# EAGLE board FET_ctrl (EAGLE 7.3.0), part 1 of 2
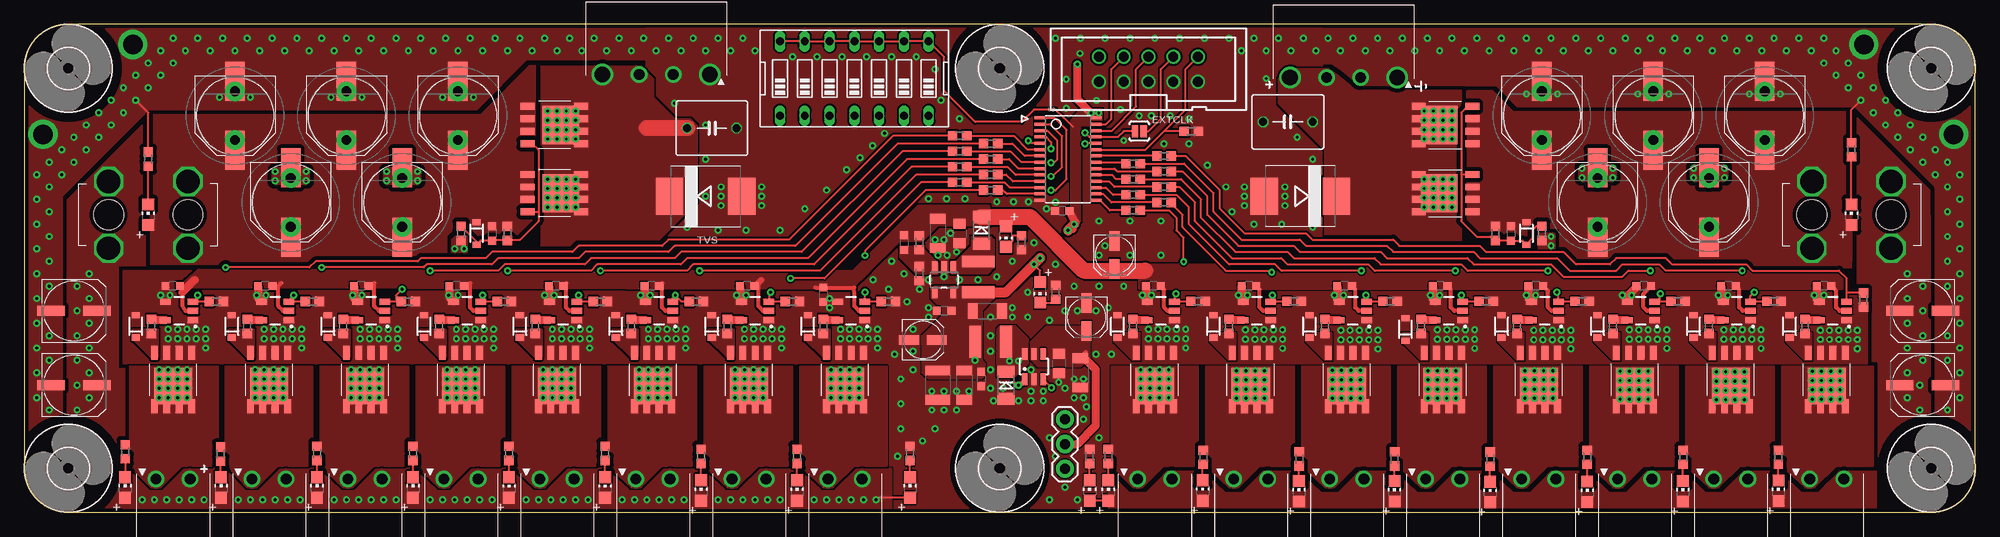
[diagram p0: board, top side]
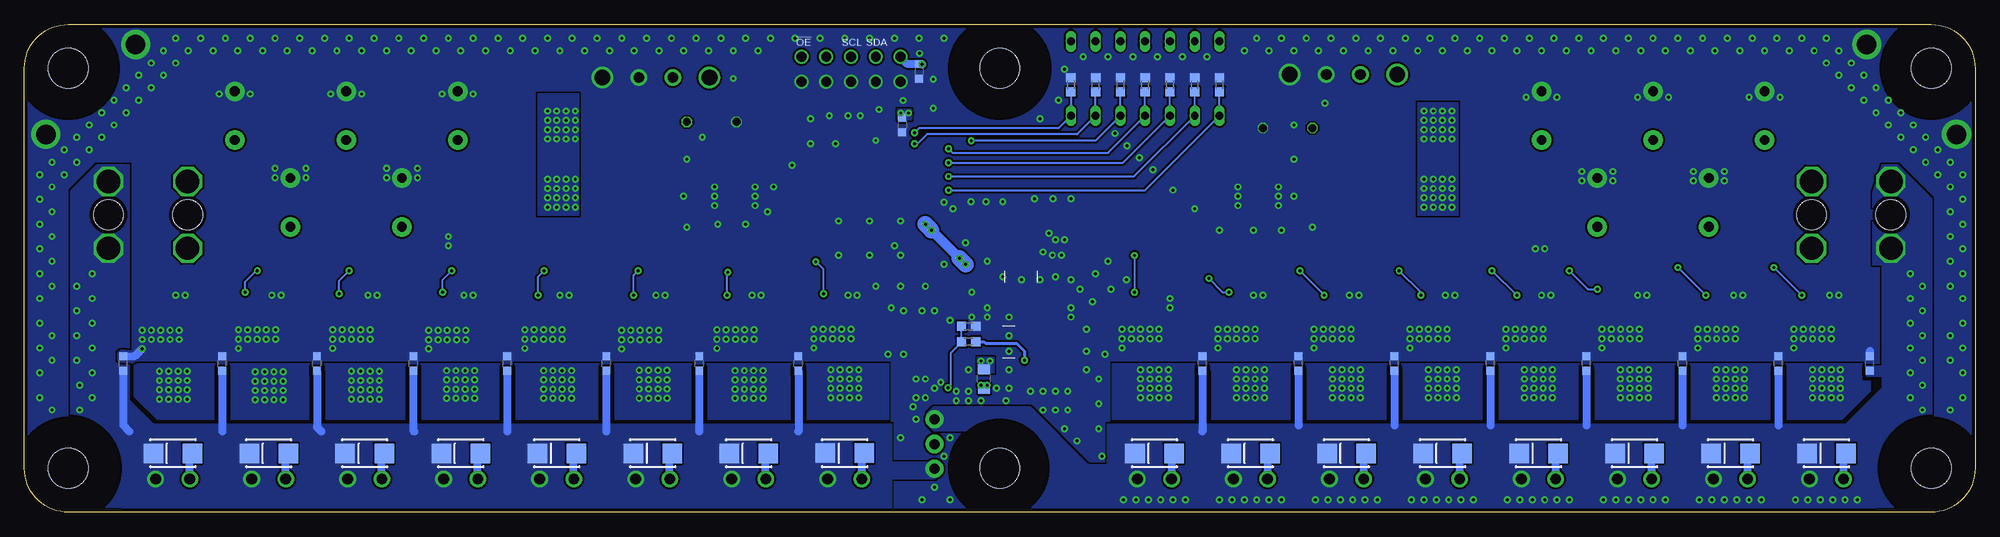
[diagram p1: board, bottom side, seen from below]

Size 200 x 50 mm. Coordinates in mm from the lower left corner, seen from the top.
Outline: 0,45.5 0,4.5 arc90 4.5,0 195.5,0 arc90 200,4.5 200,45.5 arc90 195.5,50 4.5,50 arc90 0,45.5
Copper layers (1*16): Top 0.035mm / dielectric 1.5mm / Bottom 0.035mm
Design rules "default *": minimum track width 6mil, minimum drill 0.3mm, track to track 6mil, track to pad 7mil, pad to pad 7mil, via to via 7mil, smd to smd 6mil, copper to edge 14mil, drill to drill 12mil, minimum pad ring 0.12mm, minimum via ring 8mil, stop-mask expansion 3mil, vias tented up to drill 0.31mm, thermal gap 8mil

## Footprints (pad centres in the part's own frame; a part is rotated, then mirrored left to right if it is on the bottom)
SMD_8X10_3.5HOLE = smd 4 x 2: + 3.55,0; - -3.55,0 | drill 1 pad 2: +2 2.5,0; -1 -2.5,0
C0603 = smd 0.8 x 0.8: 1 -0.75,0; 2 0.75,0
C0805 = smd 1 x 1.25: 1 -1,0; 2 1,0
UD-4X5,8_NICHICON = smd 2 x 1: + 1.425,0; - -1.425,0
C050-055X075 = drill 0.813 octagon: 1 -2.54,0; 2 2.54,0
UD-6,3X7,7_NICHICON = smd 2.8 x 1: + 2.35,0; - -2.35,0
C1206 = smd 1 x 1.6: 1 -1.5,0; 2 1.5,0
C1210 = smd 1 x 2.5: 1 -1.5,0; 2 1.5,0
SMA-DIODE_ALT = smd 2 x 2: A -2,0; C 2,0
4,1 = hole 4.1: 0,0
1X03 = drill 1.016 pad 1.88: 1 0,0; 2 2.54,0; 3 5.08,0
SJ_2S-NO = smd 0.635 x 1.27: 1 -0.45,0; 2 0.45,0
CHIP-LED0805 = smd 1.2 x 1.2: A 0,-1.05; C 0,1.05
R0603 = smd 0.95 x 0.95: 1 -0.725,0; 2 0.725,0
R1206 = smd 1.25 x 1.75: 1 -1.375,0; 2 1.375,0
EDG-07 = drill 0.813 long: 1 -7.62,-3.81; 2 -5.08,-3.81; 3 -2.54,-3.81; 4 0,-3.81; 5 2.54,-3.81; 6 5.08,-3.81; 7 7.62,-3.81; 8 7.62,3.81; 9 5.08,3.81; 10 2.54,3.81; 11 0,3.81; 12 -2.54,3.81; 13 -5.08,3.81; 14 -7.62,3.81
SMC = smd 2.8 x 3.8: A 3.7,0; C -3.7,0
TSSOP28 = smd 0.305 x 0.991: 1 -4.225,-2.918; 2 -3.575,-2.918; 3 -2.925,-2.918; 4 -2.275,-2.918; 5 -1.625,-2.918; 6 -0.975,-2.918; 7 -0.325,-2.918; 8 0.325,-2.918; 9 0.975,-2.918; 10 1.625,-2.918; 11 2.275,-2.918; 12 2.925,-2.918; 13 3.575,-2.918; 14 4.225,-2.918; 15 4.225,2.918; 16 3.575,2.918; 17 2.925,2.918; 18 2.275,2.918; 19 1.625,2.918; 20 0.975,2.918; 21 0.325,2.918; 22 -0.325,2.918; 23 -0.975,2.918; 24 -1.625,2.918; 25 -2.275,2.918; 26 -2.925,2.918; 27 -3.575,2.918; 28 -4.225,2.918
SOD-323 = smd 0.63 x 0.83: 1 -1.15,0; 2 1.15,0
SOT23-6 = smd 0.55 x 1.2: 1 0.95,1.3; 2 0,1.3; 3 -0.95,1.3; 4 -0.95,-1.3; 5 0,-1.3; 6 0.95,-1.3
FUSE-3564-297-997 = drill 2.4 pad 3 octagon: P$1 -4.064,3.429; P$2 -4.064,-3.429; P$3 4.064,3.429; P$4 4.064,-3.429 | hole 3.05: -4.064,0; 4.064,0
POWER-SO8 = smd 0.7 x 1.42: 1SOURCE -1.905,-2.39; 2SOURCE -0.635,-2.39; 3SOURCE 0.635,-2.39; 4GATE 1.905,-2.39; 5DRAIN 1.905,3.1; 6DRAIN 0.635,3.1; 7DRAIN -0.635,3.1; 8DRAIN -1.905,3.1 | smd 3.91 x 3.75: PAD_DRAIN 0,1.015
SOT23-5 = smd 0.6 x 1.1: 1 -0.95,-1.4; 2 0,-1.4; 3 0.95,-1.4; 4 0.95,1.4; 5 -0.95,1.4
SOT23-5' = smd 0.55 x 1.2: 1 -0.95,-1.3; 2 0,-1.3; 3 0.95,-1.3; 4 0.95,1.3; 5 -0.95,1.3
1212 = smd 1.2 x 3.3: P$1 -1.575,0; P$2 1.575,0
1751248 = drill 1.1 pad 1.7: 1 -1.75,-0.1; 2 1.75,-0.1
1751264 = drill 1.6 pad 2.2: 1 -5.5,-0.1; 4 5.5,-0.1 | drill 1.1 pad 1.7: 2 -1.75,-0.1; 3 1.75,-0.1
PAK100/2500-10 = drill 1 pad 1.422: 1 -5.08,-1.27; 2 -5.08,1.27; 3 -2.54,-1.27; 4 -2.54,1.27; 5 0,-1.27; 6 0,1.27; 7 2.54,-1.27; 8 2.54,1.27; 9 5.08,-1.27; 10 5.08,1.27

## Placement (x,y rotation side)
C1  [SMD_8X10_3.5HOLE]  21.59,40.64 270 top
C2  [SMD_8X10_3.5HOLE]  33.02,40.64 270 top
C3  [C0603]  15.21,23.18 180 top
C4  [C0603]  24.7,23.18 180 top
C5  [SMD_8X10_3.5HOLE]  44.45,40.64 270 top
C6  [SMD_8X10_3.5HOLE]  27.3,31.75 270 top
C7  [SMD_8X10_3.5HOLE]  178.44,40.64 270 top
C8  [SMD_8X10_3.5HOLE]  167,40.64 270 top
C9  [C0805]  101.6,13.65 90 bottom
C10  [SMD_8X10_3.5HOLE]  155.57,40.64 270 top
C11  [C0603]  47.94,28.57 270 top
C12  [C0603]  154.95,23.18 180 top
C13  [C0603]  166.02,23.18 180 top
C14  [C0603]  174.71,23.18 180 top
C15  [C0603]  184.51,23.18 180 top
C16  [C0603]  34.54,23.18 180 top
C17  [C0603]  44.32,23.18 180 top
C18  [C0603]  54.53,23.18 180 top
C19  [C0603]  64.33,23.18 180 top
C20  [C0603]  74.1,23.18 180 top
C21  [C0603]  81.92,22.29 270 top
C22  [C0603]  115.75,23.18 180 top
C23  [C0603]  125.55,23.18 180 top
C24  [C0603]  135.35,23.18 180 top
C25  [C0603]  145.15,23.18 180 top
C26  [C0603]  10.79,15.24 90 bottom
C27  [C0603]  20.16,15.24 90 bottom
C28  [C0603]  30,15.24 90 bottom
C29  [C0603]  39.85,15.24 90 bottom
C30  [C0603]  49.69,15.24 90 bottom
C31  [C0603]  59.53,15.24 90 bottom
C32  [C0603]  69.37,15.24 90 bottom
C33  [C0603]  79.22,15.24 90 bottom
C34  [C0603]  120.65,15.24 90 bottom
C35  [C0603]  130.81,15.24 90 bottom
C36  [C0603]  140.34,15.24 90 bottom
C37  [C0603]  150.5,15.24 90 bottom
C38  [C0603]  160.12,15.24 90 bottom
C39  [C0603]  170,15.24 90 bottom
C40  [SMD_8X10_3.5HOLE]  38.73,31.75 270 top
C41  [SMD_8X10_3.5HOLE]  172.72,31.75 270 top
C42  [UD-4X5,8_NICHICON]  92.12,17.65 0 top
C43  [UD-4X5,8_NICHICON]  111.76,26.35 270 top
C44  [C0603]  179.71,15.24 90 bottom
C45  [C0603]  189.87,15.24 90 bottom
C46  [SMD_8X10_3.5HOLE]  161.29,31.75 270 top
C47  [C0603]  152.4,28.57 270 top
C48  [C050-055X075]  70.48,39.37 0 top
C49  [C0603]  106.4,30.86 180 top
C51  [C0603]  108.28,45.19 270 bottom
C52  [C0603]  110.01,39.69 270 bottom
C54  [UD-6,3X7,7_NICHICON]  5.08,13.02 0 top
C55  [C050-055X075]  129.54,40.01 180 top
C56  [UD-6,3X7,7_NICHICON]  5.08,20.64 0 top
C57  [UD-6,3X7,7_NICHICON]  194.63,20.64 180 top
C58  pF  [C0603]  90.17,27.62 270 top
C59  10uF  [C1206]  98.74,20.64 0 top
C60  10uF  [C0603]  94.3,20.64 180 top
C61  [UD-6,3X7,7_NICHICON]  194.63,13.02 180 top
C62  [UD-4X5,8_NICHICON]  108.9,20 270 top
CIN  [C0805]  106.06,15.24 270 top
CIN1  10uF  [C1206]  108.27,14.29 270 top
COUT  100nG  [C0603]  98.11,13.65 270 top
COUT1  22uF  [C1210]  93.63,13.02 270 top
COUT2  10uF  [C1206]  96.35,13.02 270 top
CTPSOUT  4.7uF  [C1206]  93.66,28.57 270 top
CTPSOUT1  4.7uF  [C0805]  95.89,28.57 270 top
D1  [SMA-DIODE_ALT]  15.24,6.03 180 bottom
D2  [SMA-DIODE_ALT]  135.58,6.03 180 bottom
D3  [SMA-DIODE_ALT]  25.08,6.03 180 bottom
D4  [SMA-DIODE_ALT]  34.92,6.03 180 bottom
D5  [SMA-DIODE_ALT]  44.77,6.03 180 bottom
D6  [SMA-DIODE_ALT]  54.61,6.03 180 bottom
D7  [SMA-DIODE_ALT]  64.45,6.03 180 bottom
D8  [SMA-DIODE_ALT]  74.3,6.03 180 bottom
D9  [SMA-DIODE_ALT]  84.14,6.03 180 bottom
D10  [SMA-DIODE_ALT]  115.89,6.05 180 bottom
D11  [SMA-DIODE_ALT]  125.74,6.03 180 bottom
D12  [SMA-DIODE_ALT]  145.41,6.03 180 bottom
D13  [SMA-DIODE_ALT]  155.26,6.03 180 bottom
D14  [SMA-DIODE_ALT]  165.11,6.03 180 bottom
D15  [SMA-DIODE_ALT]  174.95,6.03 180 bottom
D16  [SMA-DIODE_ALT]  184.78,6.03 180 bottom
H1  MOUNT-HOLE4.1  [4,1]  195.5,4.5 0 top
H2  MOUNT-HOLE4.1  [4,1]  100,45.5 0 top
H9  MOUNT-HOLE4.1  [4,1]  195.5,45.5 0 top
H10  MOUNT-HOLE4.1  [4,1]  4.5,4.5 0 top
H11  MOUNT-HOLE4.1  [4,1]  100,4.5 0 top
H12  MOUNT-HOLE4.1  [4,1]  4.5,45.5 0 top
JP1  JUMPER-3PTH  [1X03]  106.68,4.45 90 top
JP2  [SJ_2S-NO]  114.3,39.05 180 top
LIN1  [CHIP-LED0805]  90.81,2.54 0 top
LIN2  [CHIP-LED0805]  109.22,2.22 0 top
LIN3  [CHIP-LED0805]  104.14,22.54 180 top
LIN4  [CHIP-LED0805]  100.65,28.26 180 top
LIN5  [CHIP-LED0805]  12.7,30.48 0 top
LIN6  [CHIP-LED0805]  187.32,30.48 0 top
R1  [R0603]  30,6.03 270 top
R2  [R0603]  39.84,6.03 270 top
R3  [R0603]  49.69,6.03 270 top
R4  [R0603]  59.53,6.03 270 top
R5  [R0603]  69.37,5.71 270 top
R6  [R0603]  79.21,5.71 270 top
R7  [R0603]  111.12,5.71 270 top
R8  [R0603]  120.87,5.64 270 top
R9  [R0603]  20.14,5.95 270 top
R10  [R0603]  10.33,6.19 270 top
R11  [R0603]  130.71,5.46 270 top
R12  [R0603]  140.48,5.46 270 top
R13  [R0603]  150.29,5.45 270 top
R14  [R0603]  160.23,5.64 270 top
R15  [R0603]  170.07,5.64 270 top
R16  [R0603]  179.83,5.64 270 top
R17  [R0603]  92.71,43.81 90 bottom
R18  [R0603]  103.19,19.05 180 bottom
R19  [R0603]  103.19,17.46 180 bottom
R20  [R0603]  105.73,22.54 270 top
R21  [R0603]  77.47,43.81 90 bottom
R22  [R0603]  80.01,43.81 90 bottom
R23  [R0603]  82.55,43.81 90 bottom
R24  [R0603]  90.81,6.03 270 top
R25  [R0603]  109.22,5.71 270 top
R26  [R0603]  85.09,43.81 90 bottom
R27  [R0603]  87.63,43.81 90 bottom
R28  [R0603]  102.23,27.62 90 top
R29  [R0603]  91.76,24.45 90 top
R30  [R0603]  91.76,27.62 90 top
R31  [R0603]  12.7,36.2 270 top
R32  [R0603]  187.32,37.15 270 top
R33  [R0603]  90.17,43.81 90 bottom
R34  [R0603]  119.64,39.05 0 top
R_DRVP  [R0603]  19.68,21.59 180 top
R_DRVP1  [R0603]  29.53,21.59 180 top
R_DRVP2  [R0603]  39.37,21.59 180 top
R_DRVP3  [R0603]  49.21,21.59 180 top
R_DRVP4  [R0603]  59.05,21.59 180 top
R_DRVP5  [R0603]  68.9,21.59 180 top
R_DRVP6  [R0603]  78.74,21.59 180 top
R_DRVP7  [R0603]  88.58,21.59 180 top
R_DRVP8  [R0603]  120.33,21.62 180 top
R_DRVP9  [R0603]  130.18,21.62 180 top
R_DRVP10  [R0603]  140.02,21.62 180 top
R_DRVP11  [R0603]  149.86,21.62 180 top
R_DRVP12  [R0603]  159.7,21.62 180 top
R_DRVP13  [R0603]  169.54,21.62 180 top
R_DRVP14  [R0603]  179.39,21.62 180 top
R_DRVP15  [R0603]  188.55,21.76 90 top
R_PWM0  [R0603]  95.89,38.58 0 top
R_PWM1  [R0603]  99.06,37.78 0 top
R_PWM2  [R0603]  95.89,36.99 0 top
R_PWM3  [R0603]  99.06,36.2 0 top
R_PWM4  [R0603]  95.89,35.4 0 top
R_PWM5  [R0603]  99.06,34.61 0 top
R_PWM6  [R0603]  95.89,33.82 0 top
R_PWM7  [R0603]  99.06,33.02 0 top
R_PWM8  [R0603]  113.67,30.94 180 top
R_PWM9  [R0603]  116.84,31.75 180 top
R_PWM10  [R0603]  113.67,32.53 180 top
R_PWM11  [R0603]  116.84,33.34 180 top
R_PWM12  [R0603]  113.67,34.13 180 top
R_PWM13  [R0603]  116.84,34.92 180 top
R_PWM14  [R0603]  113.67,35.72 180 top
R_PWM15  [R0603]  116.84,36.51 180 top
RG1  [R0603]  13.02,19.05 270 top
RG2  [R0603]  22.86,19.05 270 top
RG3  [R0603]  32.7,19.05 270 top
RG4  [R0603]  42.55,19.05 270 top
RG5  [R0603]  52.39,19.05 270 top
RG6  [R0603]  62.23,19.05 270 top
RG7  [R0603]  72.07,19.05 270 top
RG8  [R0603]  81.92,19.05 270 top
RG9  [R0603]  113.67,19.05 270 top
RG10  [R0603]  123.51,19.05 270 top
RG11  [R0603]  133.35,19.05 270 top
RG12  [R0603]  143.19,19.05 270 top
RG13  [R0603]  153.03,19.05 270 top
RG14  [R0603]  162.88,19.05 270 top
RG15  [R0603]  172.72,19.05 270 top
RG16  [R0603]  182.56,19.05 270 top
ROUTL  [CHIP-LED0805]  10.32,2.54 0 top
ROUTL1  [CHIP-LED0805]  20.16,2.54 0 top
ROUTL2  [CHIP-LED0805]  30,2.54 0 top
ROUTL3  [CHIP-LED0805]  39.84,2.54 0 top
ROUTL4  [CHIP-LED0805]  49.69,2.53 0 top
ROUTL5  [CHIP-LED0805]  59.53,2.53 0 top
ROUTL6  [CHIP-LED0805]  69.37,2.22 0 top
ROUTL7  [CHIP-LED0805]  79.21,2.22 0 top
ROUTL8  [CHIP-LED0805]  111.12,2.22 0 top
ROUTL9  [CHIP-LED0805]  120.81,2.23 0 top
ROUTL10  [CHIP-LED0805]  130.67,2.16 0 top
ROUTL11  [CHIP-LED0805]  140.47,2.16 0 top
ROUTL12  [CHIP-LED0805]  150.28,2.07 0 top
ROUTL13  [CHIP-LED0805]  160.23,2.11 0 top
ROUTL14  [CHIP-LED0805]  170.03,2.15 0 top
ROUTL15  [CHIP-LED0805]  179.84,2.18 0 top
RP1  [R0603]  44.77,28.57 270 top
RP2  [R0603]  155.57,28.57 270 top
RP3  [R0603]  150.81,28.57 270 top
RP4  [R0603]  49.53,28.57 270 top
SCHOTTKY1  [R1206]  100.65,13.02 90 top
SCHOTTKY2  [R1206]  98.11,28.89 90 top
SW1  [EDG-07]  85.09,44.45 0 top
TVS  [SMC]  69.85,32.38 0 top
TVS1  TVS  [SMC]  130.81,32.38 180 top
U2  [TSSOP28]  107,36.2 270 top
U$1  Z5V  [SOD-323]  141.6,18.73 90 top
U$2  Z5V  [SOD-323]  11.43,19.05 90 top
U$3  Z5V  [SOD-323]  21.27,19.05 90 top
U$4  Z5V  [SOD-323]  31.11,19.05 90 top
U$5  Z5V  [SOD-323]  40.98,19.05 90 top
U$6  Z5V  [SOD-323]  50.8,19.05 90 top
U$7  Z5V  [SOD-323]  151.45,19.05 90 top
U$8  Z5V  [SOD-323]  70.48,19.05 90 top
U$9  Z5V  [SOD-323]  80.33,19.05 90 top
U$10  Z5V  [SOD-323]  112.08,19.05 90 top
U$11  Z5V  [SOD-323]  121.92,19.05 90 top
U$12  Z5V  [SOD-323]  161.29,19.05 90 top
U$13  Z5V  [SOD-323]  171.13,19.05 90 top
U$14  Z5V  [SOD-323]  180.97,19.05 90 top
U$15  ACT4088  [SOT23-6]  103.5,14.92 180 top
U$16  Z5V  [SOD-323]  46.35,28.57 270 top
U$17  20A FUSE  [FUSE-3564-297-997]  12.7,30.48 180 top
U$18  SO8_NFET  [POWER-SO8]  15.24,13.97 180 top
U$19  MCP1416  [SOT23-5]  15.88,20.64 90 top
U$20  SO8_NFET  [POWER-SO8]  25.08,13.97 180 top
U$21  SO8_NFET  [POWER-SO8]  34.92,13.97 180 top
U$22  SO8_NFET  [POWER-SO8]  44.77,13.97 180 top
U$23  SO8_NFET  [POWER-SO8]  54.61,13.97 180 top
U$24  SO8_NFET  [POWER-SO8]  64.45,13.97 180 top
U$25  SO8_NFET  [POWER-SO8]  74.3,13.97 180 top
U$26  SO8_NFET  [POWER-SO8]  84.14,13.97 180 top
U$27  SO8_NFET  [POWER-SO8]  115.89,13.97 180 top
U$28  SO8_NFET  [POWER-SO8]  125.73,13.97 180 top
U$29  MCP1416  [SOT23-5]  25.72,20.64 90 top
U$30  MCP1416  [SOT23-5]  35.56,20.64 90 top
U$31  MCP1416  [SOT23-5]  45.4,20.64 90 top
U$32  MCP1416  [SOT23-5]  55.24,20.64 90 top
U$33  MCP1416  [SOT23-5]  65.09,20.64 90 top
U$34  MCP1416  [SOT23-5]  74.93,20.64 90 top
U$35  MCP1416  [SOT23-5]  84.77,20.64 90 top
U$36  MCP1416  [SOT23-5]  116.52,20.64 90 top
U$37  MCP1416  [SOT23-5]  126.36,20.64 90 top
U$38  MCP1416  [SOT23-5]  136.21,20.64 90 top
U$39  MCP1416  [SOT23-5]  146.05,20.64 90 top
U$40  MCP1416  [SOT23-5]  155.89,20.64 90 top
U$41  MCP1416  [SOT23-5]  165.74,20.64 90 top
U$42  MCP1416  [SOT23-5]  175.58,20.64 90 top
U$43  MCP1416  [SOT23-5]  185.42,20.64 90 top
U$44  SO8_NFET  [POWER-SO8]  135.57,13.97 180 top
U$45  SO8_NFET  [POWER-SO8]  145.41,13.97 180 top
U$46  SO8_NFET  [POWER-SO8]  155.26,13.97 180 top
U$47  SO8_NFET  [POWER-SO8]  165.1,13.97 180 top
U$48  SO8_NFET  [POWER-SO8]  174.94,13.97 180 top
U$49  SO8_NFET  [POWER-SO8]  184.78,13.97 180 top
U$52  SO8_PFET  [POWER-SO8]  53.98,39.69 270 top
U$53  SO8_PFET  [POWER-SO8]  53.98,32.7 270 top
U$54  Z5V  [SOD-323]  153.99,28.57 270 top
U$55  20A FUSE  [FUSE-3564-297-997]  187.32,30.48 0 top
U$56  SO8_PFET  [POWER-SO8]  146.05,39.69 90 top
U$57  SO8_PFET  [POWER-SO8]  146.05,32.7 90 top
U$58  TPS61040  [SOT23-5']  94.3,23.81 180 top
U$59  L1212  [1212]  97.79,24.13 90 top
U$60  L1212  [1212]  99.06,17.46 180 top
X1  [1751248]  15.24,3.49 0 top
X2  1751248  [1751248]  135.58,3.49 0 top
X3  1751264  [1751264]  135.25,44.45 180 top
X4  1751248  [1751248]  145.42,3.49 0 top
X5  1751248  [1751248]  155.26,3.49 0 top
X6  1751248  [1751248]  165.11,3.49 0 top
X7  1751248  [1751248]  25.08,3.49 0 top
X8  1751248  [1751248]  34.92,3.49 0 top
X9  1751248  [1751248]  44.77,3.49 0 top
X10  1751248  [1751248]  54.61,3.49 0 top
X11  1751248  [1751248]  64.45,3.49 0 top
X12  1751248  [1751248]  74.3,3.49 0 top
X13  1751248  [1751248]  84.14,3.49 0 top
X14  1751248  [1751248]  174.95,3.49 0 top
X15  1751264  [1751264]  64.77,44.77 180 top
X16  1751248  [1751248]  115.89,3.49 0 top
X17  1751248  [1751248]  125.74,3.49 0 top
X18  1751248  [1751248]  184.79,3.49 0 top
X19  2510-  [PAK100/2500-10]  115.25,45.4 0 top
ZENER  Z5V  [SOD-323]  60.64,19.05 90 top
ZENER1  Z5V  [SOD-323]  131.76,19.05 90 top

## Library data of the parts
C1-C41 C44-C47 C49 C51 C52 C58-C60 CIN CIN1 COUT COUT1 COUT2 CTPSOUT CTPSOUT1 R1-R34 R_DRVP R_DRVP1-R_DRVP15 R_PWM0 R_PWM1-R_PWM15 RG1-RG16 RP1-RP4 SCHOTTKY1 SCHOTTKY2 U$15 U$17-U$49 U$52 U$53 U$55-U$57 U$59 U$60 = wes
C42 C43 C48 C54-C57 C61 C62 = rcl
D1-D16 U$1-U$14 U$16 U$54 ZENER ZENER1 = SparkFun-DiscreteSemi
H1 H2 H9-H12 = holes
JP1 JP2 = SparkFun-Passives
LIN1-LIN6 ROUTL ROUTL1-ROUTL15 U2 = adafruit
SW1 = special
TVS TVS1 = diode
U$58 = SparkFun-PowerIC
X1 X2 X4-X14 X16-X18 = wes; OC_FARNELL: unknown; OC_NEWARK: unknown
X3 X15 = wes; MPN: 1751264; OC_FARNELL: unknown; OC_NEWARK: 10R0934
X19 = con-3m; MF: 3M; MPN: 2510-6002UB; OC_FARNELL: 9838244; OC_NEWARK: 46F4725

## Nets
+5V: C42.+ C49.1 C51.1 C52.1 C59.1 C60.1 COUT1.1 COUT2.1 COUT.1 LIN3.A R19.1 SW1.8 SW1.9 SW1.10 SW1.11 SW1.12 SW1.13 SW1.14 U2.28 U$58.4 U$58.5 U$59.P$1 U$60.P$2 X19.2
+12V: C3.1 C4.1 C12.1 C13.1 C14.1 C15.1 C16.1 C17.1 C18.1 C19.1 C20.1 C21.1 C22.1 C23.1 C24.1 C25.1 C43.+ C58.1 CTPSOUT1.1 CTPSOUT.1 LIN4.A R30.2 SCHOTTKY2.2 U$19.2 U$29.2 U$30.2 U$31.2 U$32.2 U$33.2 U$34.2 U$35.2 U$36.2 U$37.2 U$38.2 U$39.2 U$40.2 U$41.2 U$42.2 U$43.2
A0: R21.1 SW1.1 U2.1
A1: R22.1 SW1.2 U2.2
A2: R23.1 SW1.3 U2.3
A3: R26.1 SW1.4 U2.4
A4: R27.1 SW1.5 U2.5
A5: R33.1 SW1.6 U2.24
A6: JP2.2 R17.1 SW1.7 U2.25
BASE1: R_DRVP.2 R_PWM0.1 U$19.3
BASE2: R_DRVP1.2 R_PWM1.1 U$29.3
BASE3: R_DRVP2.2 R_PWM2.1 U$30.3
BASE4: R_DRVP3.2 R_PWM3.1 U$31.3
BASE5: R_DRVP4.2 R_PWM4.1 U$32.3
BASE6: R_DRVP5.2 R_PWM5.1 U$33.3
BASE7: R_DRVP6.2 R_PWM6.1 U$34.3
BASE8: R_DRVP7.2 R_PWM7.1 U$35.3
BASE9: R_DRVP8.2 R_PWM8.1 U$36.3
BASE10: R_DRVP9.2 R_PWM9.1 U$37.3
BASE11: R_DRVP10.2 R_PWM10.1 U$38.3
BASE12: R_DRVP11.2 R_PWM11.1 U$39.3
BASE13: R_DRVP12.2 R_PWM12.1 U$40.3
BASE14: R_DRVP13.2 R_PWM13.1 U$41.3
BASE15: R_DRVP14.2 R_PWM14.1 U$42.3
BASE16: R_DRVP15.2 R_PWM15.1 U$43.3
EXTCLK: JP2.1 X19.8
GND: C1.- C1.-1 C2.- C2.-1 C3.2 C4.2 C5.- C5.-1 C6.- C6.-1 C7.- C7.-1 C8.- C8.-1 C10.- C10.-1 C12.2 C13.2 C14.2 C15.2 C16.2 C17.2 C18.2 C19.2 C20.2 C21.2 C22.2 C23.2 C24.2 C25.2 C26.2 C27.2 C28.2 C29.2 C30.2 C31.2 C32.2 C33.2 C34.2 C35.2 C36.2 C37.2 C38.2 C39.2 C40.- C40.-1 C41.- C41.-1 C42.- C43.- C44.2 C45.2 C46.- C46.-1 C48.2 C49.2 C51.2 C52.2 C54.- C55.2 C56.- C57.- C59.2 C60.2 C61.- C62.- CIN1.2 CIN.2 COUT1.2 COUT2.2 COUT.2 CTPSOUT1.2 CTPSOUT.2 R17.2 R18.1 R20.1 R21.2 R22.2 R23.2 R24.1 R25.1 R26.2 R27.2 R28.1 R29.1 R31.1 R32.1 R33.2 R34.2 R_DRVP1.1 R_DRVP2.1 R_DRVP3.1 R_DRVP4.1 R_DRVP5.1 R_DRVP6.1 R_DRVP7.1 R_DRVP8.1 R_DRVP9.1 R_DRVP10.1 R_DRVP11.1 R_DRVP12.1 R_DRVP13.1 R_DRVP14.1 R_DRVP15.1 R_DRVP.1 RP1.2 RP2.2 SCHOTTKY1.1 TVS1.A TVS.A U2.14 U$1.2 U$2.2 U$3.2 U$4.2 U$5.2 U$6.2 U$7.2 U$8.2 U$9.2 U$10.2 U$11.2 U$12.2 U$13.2 U$14.2 U$15.2 U$18.1SOURCE U$18.2SOURCE U$18.3SOURCE U$19.1 U$19.4 U$20.1SOURCE U$20.2SOURCE U$20.3SOURCE U$21.1SOURCE U$21.2SOURCE U$21.3SOURCE U$22.1SOURCE U$22.2SOURCE U$22.3SOURCE U$23.1SOURCE U$23.2SOURCE U$23.3SOURCE U$24.1SOURCE U$24.2SOURCE U$24.3SOURCE U$25.1SOURCE U$25.2SOURCE U$25.3SOURCE U$26.1SOURCE U$26.2SOURCE U$26.3SOURCE U$27.1SOURCE U$27.2SOURCE U$27.3SOURCE U$28.1SOURCE U$28.2SOURCE U$28.3SOURCE U$29.1 U$29.4 U$30.1 U$30.4 U$31.1 U$31.4 U$32.1 U$32.4 U$33.1 U$33.4 U$34.1 U$34.4 U$35.1 U$35.4 U$36.1 U$36.4 U$37.1 U$37.4 U$38.1 U$38.4 U$39.1 U$39.4 U$40.1 U$40.4 U$41.1 U$41.4 U$42.1 U$42.4 U$43.1 U$43.4 U$44.1SOURCE U$44.2SOURCE U$44.3SOURCE U$45.1SOURCE U$45.2SOURCE U$45.3SOURCE U$46.1SOURCE U$46.2SOURCE U$46.3SOURCE U$47.1SOURCE U$47.2SOURCE U$47.3SOURCE U$48.1SOURCE U$48.2SOURCE U$48.3SOURCE U$49.1SOURCE U$49.2SOURCE U$49.3SOURCE U$58.2 X3.1 X3.2 X15.1 X15.2 X19.1 X19.3 X19.5 X19.7 X19.9 ZENER1.2 ZENER.2
N$1: D1.A R10.1 U$18.5DRAIN U$18.6DRAIN U$18.7DRAIN U$18.8DRAIN U$18.PAD_DRAIN X1.1
N$2: R10.2 ROUTL.C
N$3: D2.A R11.1 U$44.5DRAIN U$44.6DRAIN U$44.7DRAIN U$44.8DRAIN U$44.PAD_DRAIN X2.1
N$4: RG11.2 U$44.4GATE ZENER1.1
N$5: LIN3.C R20.2
N$6: D12.A R12.1 U$45.5DRAIN U$45.6DRAIN U$45.7DRAIN U$45.8DRAIN U$45.PAD_DRAIN X4.1
N$7: RG12.2 U$1.1 U$45.4GATE
N$8: R1.2 ROUTL2.C
N$9: D13.A R13.1 U$46.5DRAIN U$46.6DRAIN U$46.7DRAIN U$46.8DRAIN U$46.PAD_DRAIN X5.1
N$10: RG13.2 U$7.1 U$46.4GATE
N$11: C47.2 RP2.1 RP3.2 U$54.2 U$56.4GATE U$57.4GATE
N$12: D14.A R14.1 U$47.5DRAIN U$47.6DRAIN U$47.7DRAIN U$47.8DRAIN U$47.PAD_DRAIN X6.1
N$13: RG14.2 U$12.1 U$47.4GATE
N$14: R2.2 ROUTL3.C
N$15: LIN2.C R25.2
N$16: D15.A R15.1 U$48.5DRAIN U$48.6DRAIN U$48.7DRAIN U$48.8DRAIN U$48.PAD_DRAIN X14.1
N$17: RG15.2 U$13.1 U$48.4GATE
N$18: LIN4.C R28.2
N$19: R_PWM0.2 U2.6
N$20: R_PWM1.2 U2.7
N$21: R_PWM15.2 U2.22
N$22: R_PWM14.2 U2.21
N$23: R_PWM13.2 U2.20
N$24: D16.A R16.1 U$49.5DRAIN U$49.6DRAIN U$49.7DRAIN U$49.8DRAIN U$49.PAD_DRAIN X18.1
N$25: RG16.2 U$14.1 U$49.4GATE
N$26: R3.2 ROUTL4.C
N$27: R_PWM12.2 U2.19
N$28: R18.2 R19.2 U$15.3
N$29: C9.1 U$15.1
N$30: SCHOTTKY2.1 U$58.1 U$59.P$2
N$31: LIN5.C R31.2
N$32: C58.2 R29.2 R30.1 U$58.3
N$33: LIN1.C R24.2
N$34: LIN6.C R32.2
N$37: C11.2 RP1.1 RP4.2 U$16.2 U$52.4GATE U$53.4GATE
N$39: RG1.1 U$19.5
N$40: R_PWM11.2 U2.18
N$41: R_PWM10.2 U2.17
N$42: R_PWM9.2 U2.16
N$43: R_PWM8.2 U2.15
N$44: R_PWM7.2 U2.13
N$45: R_PWM6.2 U2.12
N$46: R_PWM5.2 U2.11
N$47: R_PWM4.2 U2.10
N$48: R_PWM3.2 U2.9
N$49: R_PWM2.2 U2.8
N$50: RG2.1 U$29.5
N$51: RG3.1 U$30.5
N$52: RG4.1 U$31.5
N$53: D3.A R9.1 U$20.5DRAIN U$20.6DRAIN U$20.7DRAIN U$20.8DRAIN U$20.PAD_DRAIN X7.1
N$54: RG2.2 U$3.1 U$20.4GATE
N$55: RG5.1 U$32.5
N$56: RG6.1 U$33.5
N$58: D4.A R1.1 U$21.5DRAIN U$21.6DRAIN U$21.7DRAIN U$21.8DRAIN U$21.PAD_DRAIN X8.1
N$59: RG7.1 U$34.5
N$60: RG8.1 U$35.5
N$61: RG3.2 U$4.1 U$21.4GATE
N$62: R4.2 ROUTL5.C
N$63: RG9.1 U$36.5
N$64: RG10.1 U$37.5
N$65: RG1.2 U$2.1 U$18.4GATE
N$66: RG4.2 U$5.1 U$22.4GATE
N$67: RG11.1 U$38.5
N$68: RG12.1 U$39.5
N$70: D6.A R3.1 U$23.5DRAIN U$23.6DRAIN U$23.7DRAIN U$23.8DRAIN U$23.PAD_DRAIN X10.1
N$71: RG13.1 U$40.5
N$72: RG14.1 U$41.5
N$73: RG5.2 U$6.1 U$23.4GATE
N$74: R5.2 ROUTL6.C
N$75: RG15.1 U$42.5
N$76: RG16.1 U$43.5
N$78: R9.2 ROUTL1.C
N$82: R6.2 ROUTL7.C
N$84: R7.2 ROUTL8.C
N$86: R8.2 ROUTL9.C
N$88: R11.2 ROUTL10.C
N$90: R12.2 ROUTL11.C
N$92: R13.2 ROUTL12.C
N$94: R14.2 ROUTL13.C
N$96: R15.2 ROUTL14.C
N$98: D10.A R7.1 U$27.5DRAIN U$27.6DRAIN U$27.7DRAIN U$27.8DRAIN U$27.PAD_DRAIN X16.1
N$99: R16.2 ROUTL15.C
N$100: RG9.2 U$10.1 U$27.4GATE
N$102: D11.A R8.1 U$28.5DRAIN U$28.6DRAIN U$28.7DRAIN U$28.8DRAIN U$28.PAD_DRAIN X17.1
N$103: RG10.2 U$11.1 U$28.4GATE
N$127: D7.A R4.1 U$24.5DRAIN U$24.6DRAIN U$24.7DRAIN U$24.8DRAIN U$24.PAD_DRAIN X11.1
N$141: RG6.2 U$24.4GATE ZENER.1
N$143: D8.A R5.1 U$25.5DRAIN U$25.6DRAIN U$25.7DRAIN U$25.8DRAIN U$25.PAD_DRAIN X12.1
N$144: RG7.2 U$8.1 U$25.4GATE
N$146: D9.A R6.1 U$26.5DRAIN U$26.6DRAIN U$26.7DRAIN U$26.8DRAIN U$26.PAD_DRAIN X13.1
N$147: RG8.2 U$9.1 U$26.4GATE
OE: R34.1 U2.23 X19.10
POWERBUS_A: C26.1 C27.1 C28.1 C29.1 C30.1 C31.1 C32.1 C33.1 C54.+ C56.+ D1.C D3.C D4.C D5.C D6.C D7.C D8.C D9.C JP1.3 LIN1.A ROUTL1.A ROUTL2.A ROUTL3.A ROUTL4.A ROUTL5.A ROUTL6.A ROUTL7.A ROUTL.A U$17.P$3 U$17.P$4 X1.2 X7.2 X8.2 X9.2 X10.2 X11.2 X12.2 X13.2
POWERBUS_B: C34.1 C35.1 C36.1 C37.1 C38.1 C39.1 C44.1 C45.1 C57.+ C61.+ D2.C D10.C D11.C D12.C D13.C D14.C D15.C D16.C JP1.1 LIN2.A ROUTL8.A ROUTL9.A ROUTL10.A ROUTL11.A ROUTL12.A ROUTL13.A ROUTL14.A ROUTL15.A U$55.P$3 U$55.P$4 X2.2 X4.2 X5.2 X6.2 X14.2 X16.2 X17.2 X18.2
POWERIN_A: C48.1 TVS.C U$52.5DRAIN U$52.6DRAIN U$52.7DRAIN U$52.8DRAIN U$52.PAD_DRAIN U$53.5DRAIN U$53.6DRAIN U$53.7DRAIN U$53.8DRAIN U$53.PAD_DRAIN X15.3 X15.4
POWERIN_A1: C1.+ C1.+2 C2.+ C2.+2 C5.+ C5.+2 C6.+ C6.+2 C11.1 C40.+ C40.+2 LIN5.A RP4.1 U$16.1 U$17.P$1 U$17.P$2 U$52.1SOURCE U$52.2SOURCE U$52.3SOURCE U$53.1SOURCE U$53.2SOURCE U$53.3SOURCE
POWERIN_A2: C7.+ C7.+2 C8.+ C8.+2 C10.+ C10.+2 C41.+ C41.+2 C46.+ C46.+2 C47.1 LIN6.A RP3.1 U$54.1 U$55.P$1 U$55.P$2 U$56.1SOURCE U$56.2SOURCE U$56.3SOURCE U$57.1SOURCE U$57.2SOURCE U$57.3SOURCE
POWERIN_B: C55.1 TVS1.C U$56.5DRAIN U$56.6DRAIN U$56.7DRAIN U$56.8DRAIN U$56.PAD_DRAIN U$57.5DRAIN U$57.6DRAIN U$57.7DRAIN U$57.8DRAIN U$57.PAD_DRAIN X3.3 X3.4
Q4: D5.A R2.1 U$22.5DRAIN U$22.6DRAIN U$22.7DRAIN U$22.8DRAIN U$22.PAD_DRAIN X9.1
SCL: U2.26 X19.6
SDA: U2.27 X19.4
SW: C9.2 SCHOTTKY1.2 U$15.6 U$60.P$1
VIN: C62.+ CIN1.1 CIN.1 JP1.2 U$15.5